# Altium PCB PCB_balancing_robot_v2.PcbDoc
Units mil, origin at the board's own origin, x right, y up, seen from the top; angles counter-clockwise.
Board outline 3230 x 3540 mil, 2 copper layers (Top Layer, Bottom Layer); 35 components, 31 nets, 164 pads, 2 vias.
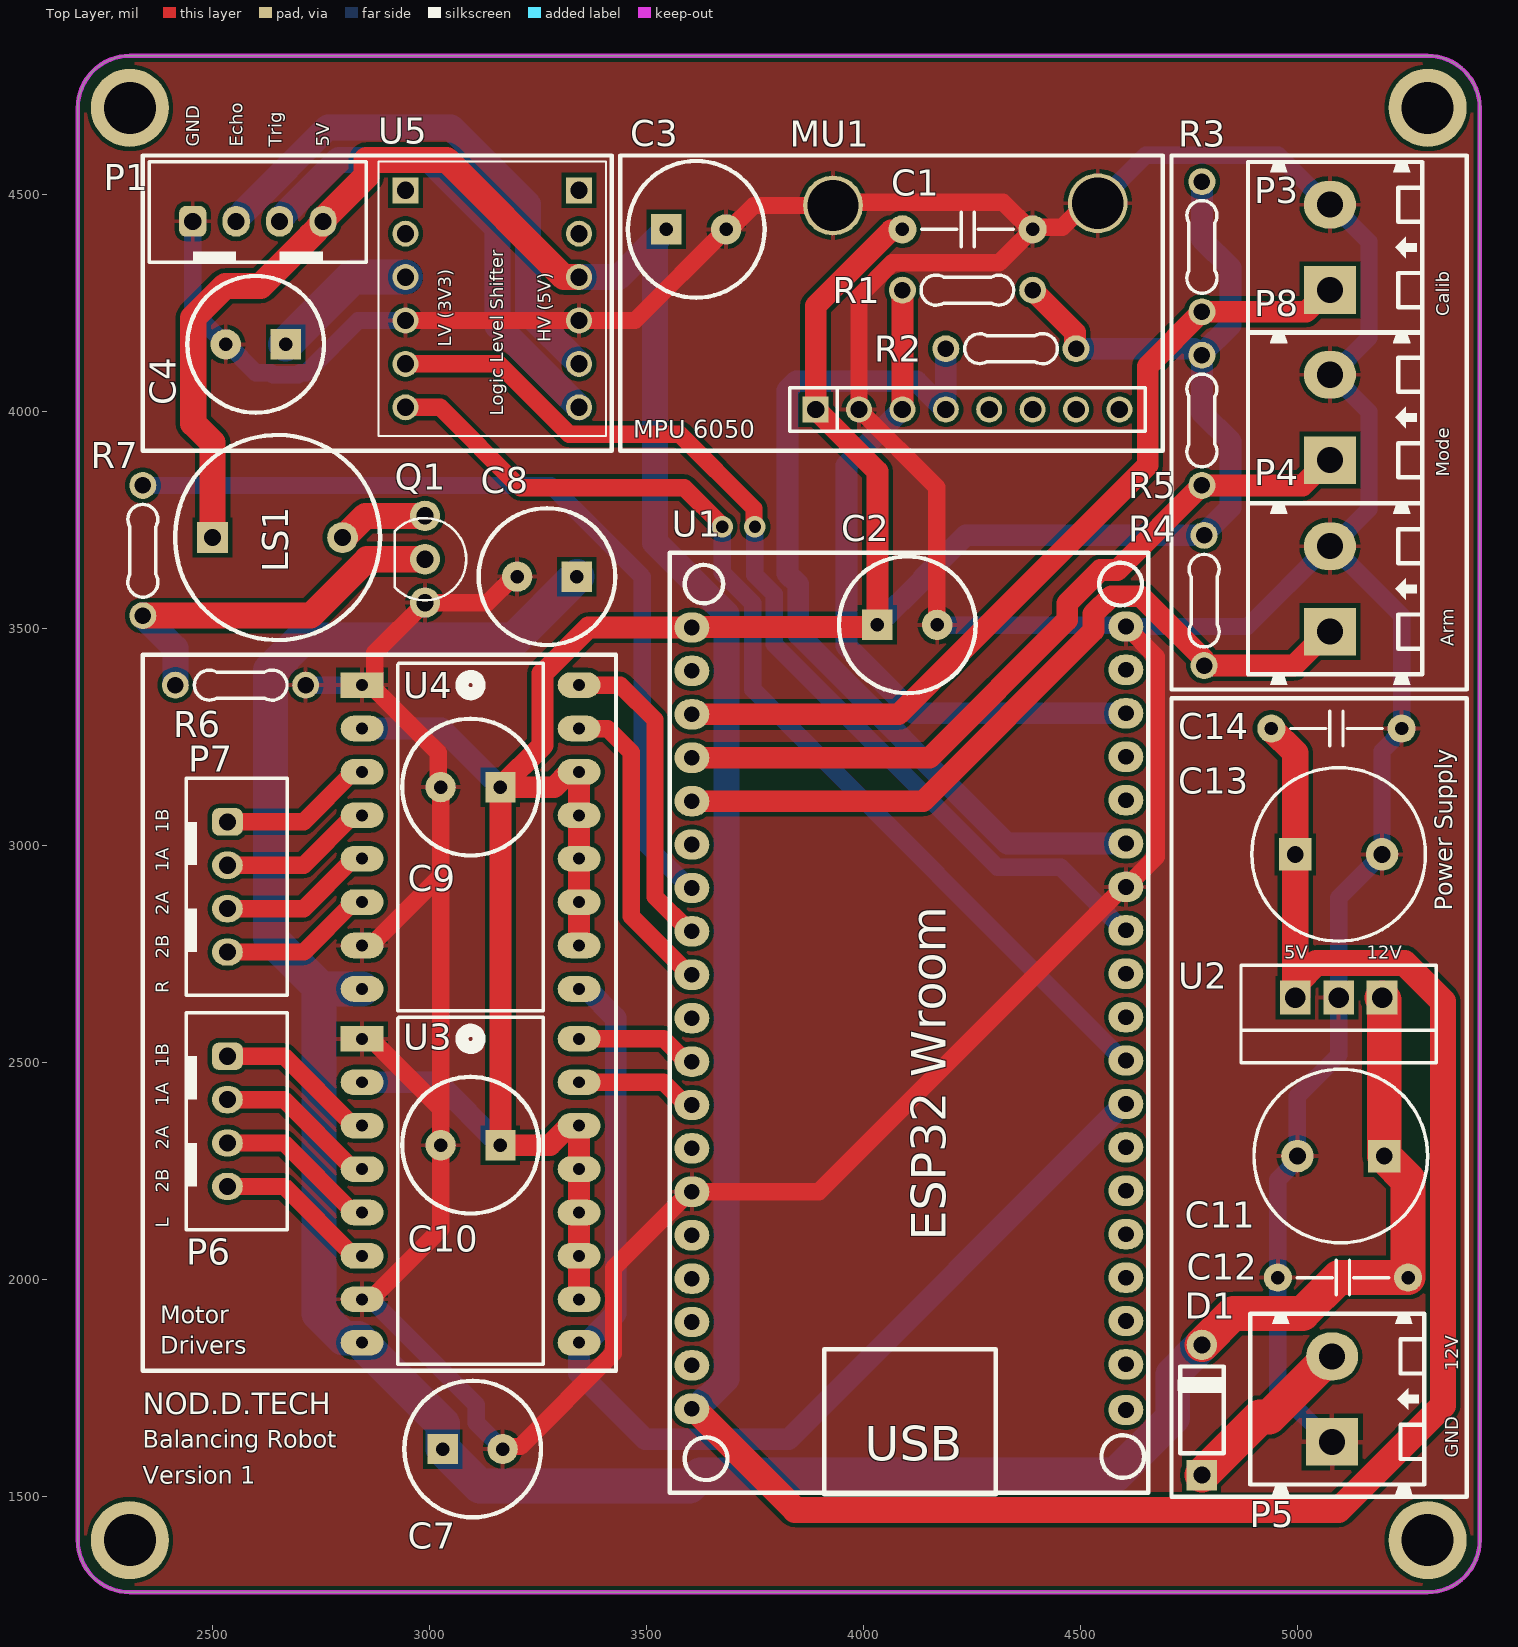
[diagram p0: Top Layer view]
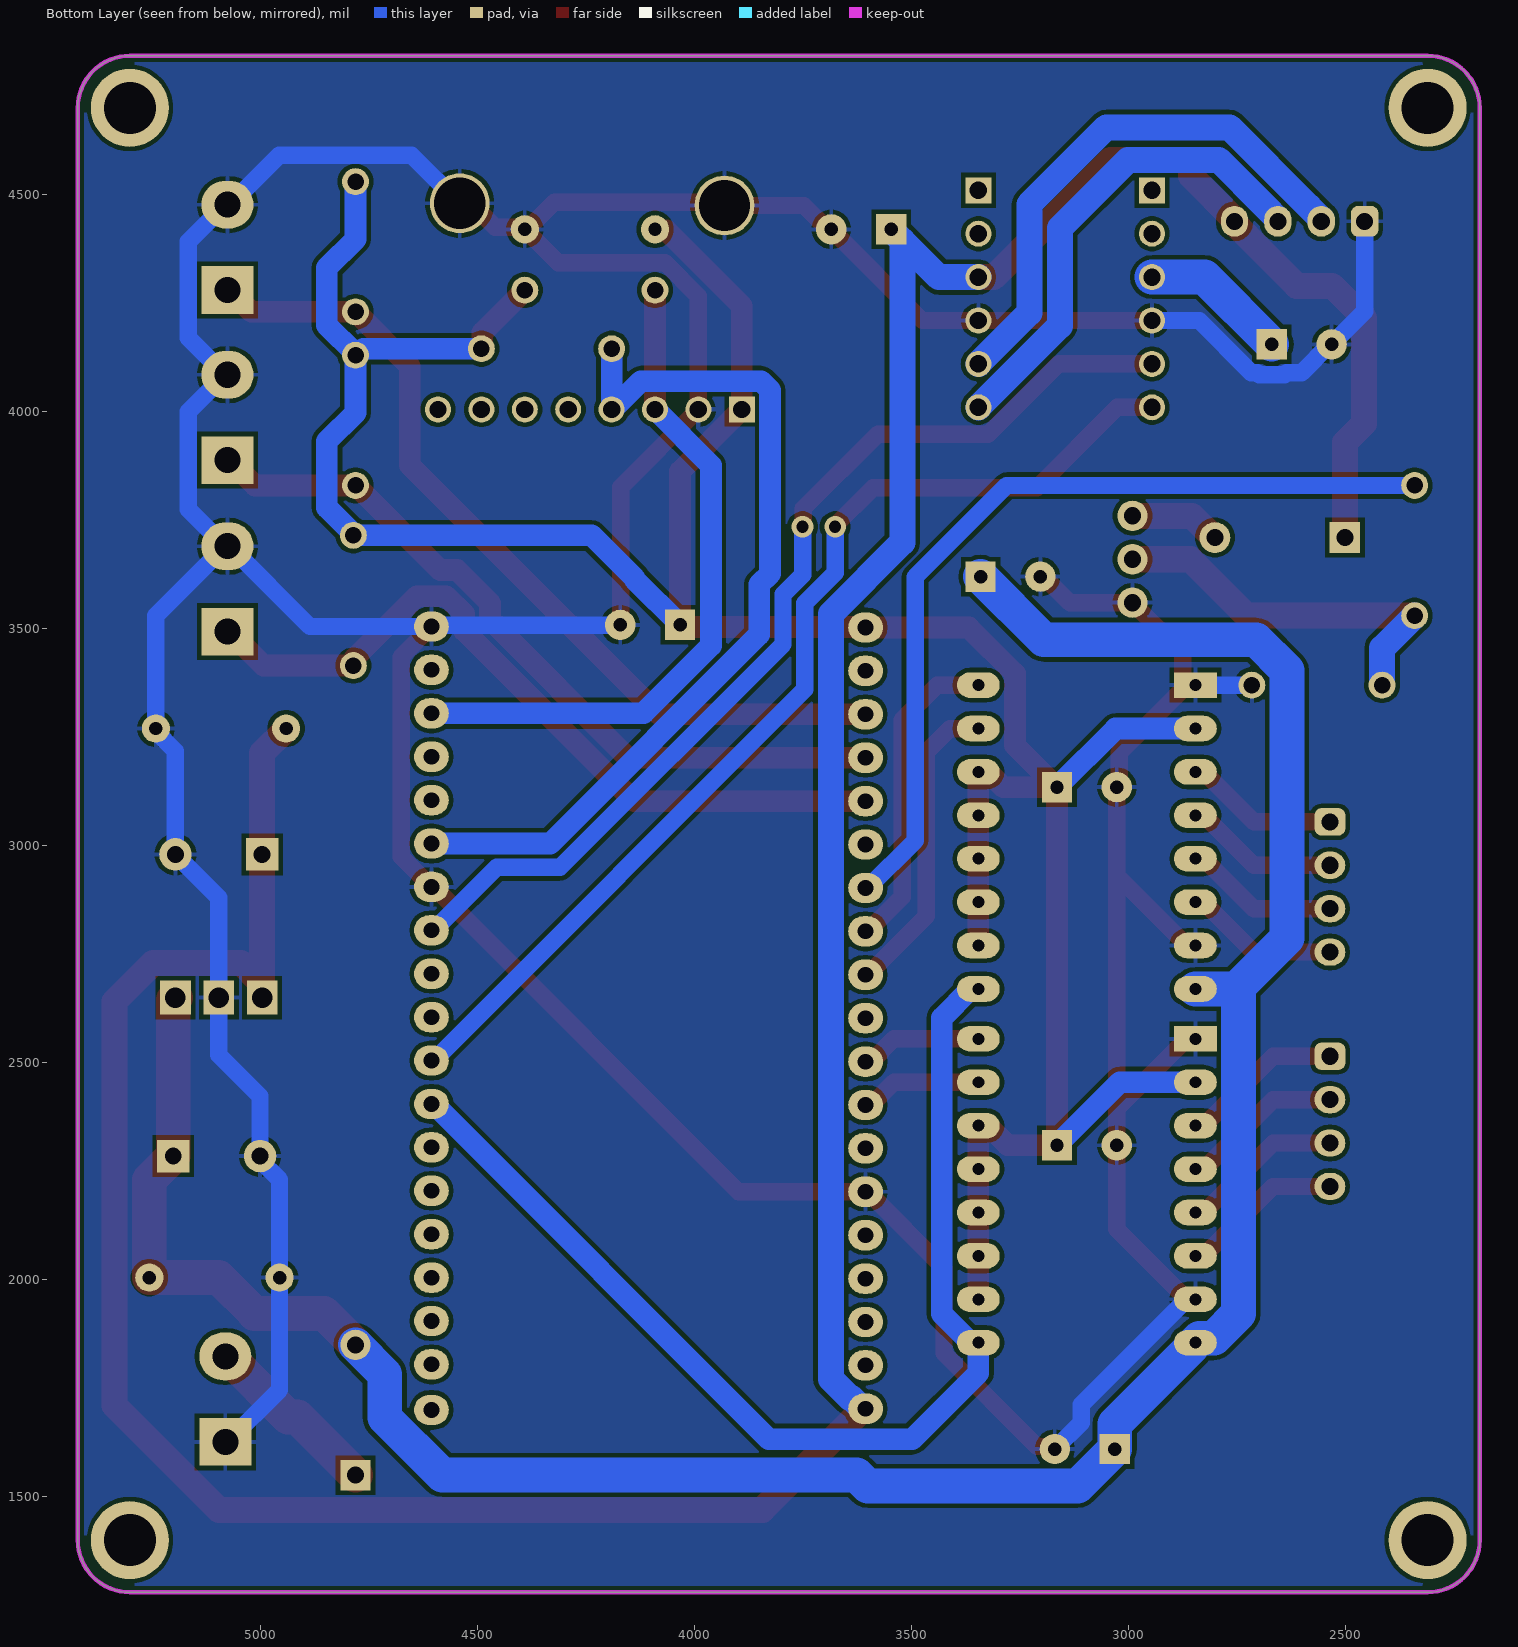
[diagram p1: Bottom Layer view, seen from below]
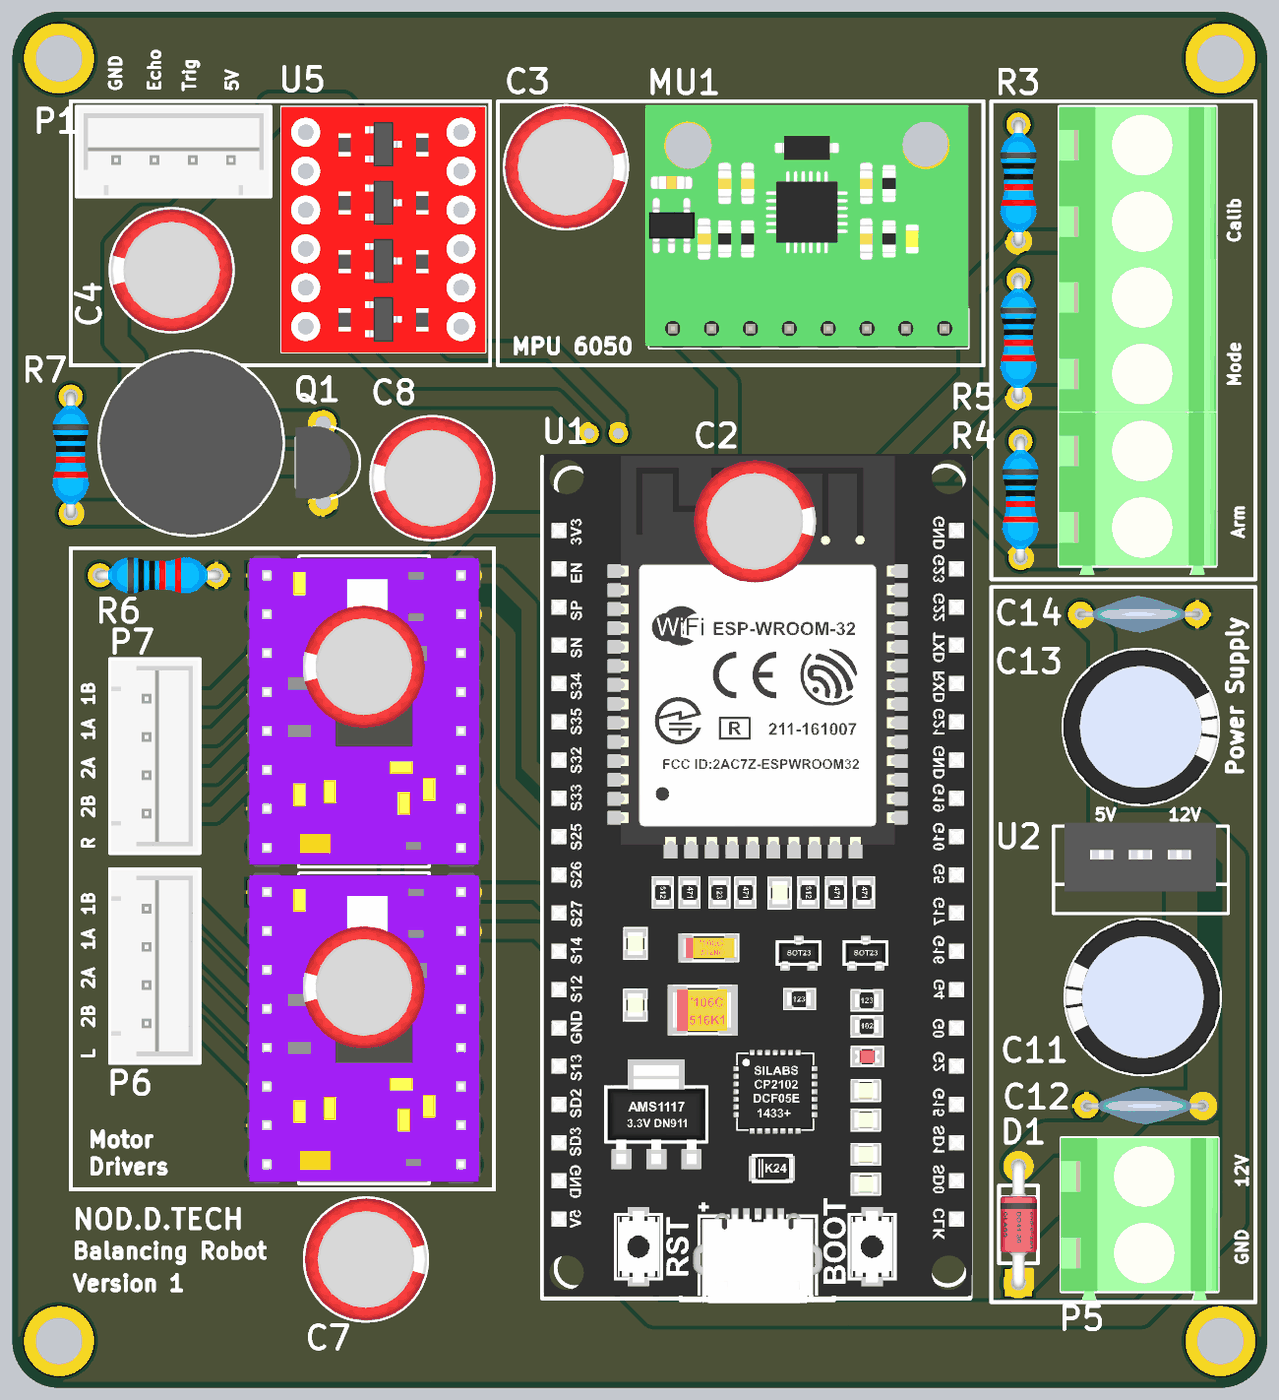
[diagram p2: 3D render of the assembled board from above, using the file's embedded part models]

## Layer stack, top to bottom
Top Solder: solder mask 0.4, Solder Resist, Dk 3.5
Top Layer: signal copper 1.4
Dielectric 1: dielectric 12.6, FR-4, Dk 4.8
Bottom Layer: signal copper 1.4
Bottom Solder: solder mask 0.4, Solder Resist, Dk 3.5

## Board outline
2190,1400 2190,4700 cw(c2310,4700) 2310,4820 5300,4820 cw(c5300,4700) 5420,4700 5420,1400 cw(c5300,1400) 5300,1280 2310,1280 cw(c2310,1400)

## Design rules (kind name [scope] priority, off if disabled: settings)
Clearance [All] p1: gap=10 ignorepadtopadclearanceinfootprint=FALSE
ComponentClearance [All] p1 off: gap=10 collisioncheckmode=3 verticalgap=10 showdistances=FALSE
HoleSize [All] p1: absolutevalues=TRUE maxlimit=130 minlimit=1 maxpercent=80.000 minpercent=20.000
HoleToHoleClearance [All] p1: gap=8 allowstackedmicrovias=TRUE
PolygonConnect [All] p1: connectstyle=Relief reliefconductorwidth=10 reliefentries=4 polygonreliefangle="90 Angle" airgapwidth=10
RoutingVias [All] p1: holewidth=28 width=50 viastyle="Through Hole" minholewidth=28 minwidth=50 maxholewidth=28 maxwidth=50
SilkToSilkClearance [All] p1: silktosilkclearance=6
SilkToSolderMaskClearance [IsPad] p1: minsilkscreentomaskgap=6 clearancetoexposedcopper=TRUE
SolderMaskExpansion [All] p1: expansion=4 istentingtop=FALSE
Width [All] p1: maxlimit=100 minlimit=10 preferedwidth=10
25 further rules are at their usual default settings.

## Components (designator, comment, footprint, x,y, rotation, side; value= is the part's Value field where it differs from the comment)
C1 "104" "CAP Ceramic/W300" 4390,4420 r180 top
C2 "C" CAP/D80/H125/LS35 4101.25,3508.75 r0 top
C3 "100uF" CAP/D80/H125/LS35 3615,4420 r0 top
C4 "100uF" CAP/D80/H125/LS35 2600,4155 r180 top
C7 "100uF" CAP/D80/H125/LS35 3100,1610 r0 top
C8 "100uF" CAP/D80/H125/LS35 3271.1,3620 r180 top
C9 "100uF" CAP/D80/H125/LS35 3095,3135 r180 top
C10 "100uF" CAP/D80/H125/LS35 3095,2310 r180 top
C11 "1000uF" CYL/D.400/LS.200 5100,2285 r180 top
C12 "104" "CAP Ceramic/W300" 5255,2005 r180 top
C13 "1000uF" CYL/D.400/LS.200 5095,2980 r0 top
C14 "104" "CAP Ceramic/W300" 4940,3270 r0 top
D1 "1N4007" DO-41 4780,1550 r90 top
LS1 "Buzzer" Buzzer-12MM 2650.39,3710 r0 top
MU1 "MPU6050" MPU6050 4110,4300 r0 top
P1 "HC-SR04" HDR/Header/4/BOX 2605,4438.48 r0 top
P3 "Button" HDR/Terminal/2/5mm 5075,4378.43 r90 top
P4 "Button" HDR/Terminal/2/5mm 5075,3591.57 r90 top
P5 "Power" HDR/Terminal/2/5mm 5080,1725 r90 top
P6 "STEPPER" HDR/Header/4/BOX 2535,2365 r270 top
P7 "STEPPER" HDR/Header/4/BOX 2535,2905 r270 top
P8 "Button" HDR/Terminal/2/5mm 5075,3986.57 r90 top
Q1 "BS170" TO92 2990,3660 r270 top
R1 "10k" "R 1/4W/300" 4390,4280 r180 top
R2 "10k" "R 1/4W/300" 4190,4145 r0 top
R3 "10k" "R 1/4W/300" 4780,4530 r270 top
R4 "10k" "R 1/4W/300" 4785,3715 r270 top
R5 "10k" "R 1/4W/300" 4780,4130 r270 top
R6 "10k" "R 1/4W/300" 2415,3370 r0 top
R7 "100" "R 1/4W/300" 2340,3830 r270 top
U1 "ESP32-DEVKI-V1.0-PIN38" ESP32-DEVKIT-V1.0-38PIN 4105,2590.09 r0 top
U2 "LM7805" TO-220 5095,2650 r180 top
U3 "A4988" A4988(driver) 2845,2555 r0 top
U4 "A4988" A4988(driver) 2845,3370 r0 top
U5 "BOB-12009" CONV_BOB-12009 3145,4260 r0 top

## Footprints (in the part's own frame and the unit in brackets; to place one, negate y for a bottom-side part, rotate by r counter-clockwise, add the part's x,y. Pads: shape width x height; smd on the part's side, far side on the other; paste and mask are expansions set on the pad)
A4988(driver) [mm]
  rect 2.5x1.5 hole 0.7: 1(0,0)
  oval 2.5x1.5 hole 0.7: 2(0,-2.54) 3(0,-5.08) 4(0,-7.62) 5(0,-10.16) 6(0,-12.7) 7(0,-15.24) 8(0,-17.78) 9(12.7,-17.78) 10(12.7,-15.24) 11(12.7,-12.7) 12(12.7,-10.16) 13(12.7,-7.62) 14(12.7,-5.08) 15(12.7,-2.54) 16(12.7,0)
  silkscreen extent 2.08,-19.05 10.62,1.27, body extent -1.27,-19.05 13.97,1.27, height 5.54
Buzzer-12MM [mm] "12MM"
  rect 1.8x1.8 hole 1: 1(-3.8,0)
  round 1.8 hole 1: 2(3.8,0)
  silkscreen extent -6,-6 6,6, body extent -6,-6 6,6, height 8.6
"CAP Ceramic/W300" [mil]
  round 65 hole 31: 1(0,0) 2(300,0)
  silkscreen extent 45,-40 255,40, body extent -8,-47 307,47, height 340
CAP/D80/H125/LS35 [mil] "Dia 8mm, Heigh 12.5mm, Lead Space 3.5mm (470uF/16V small)"
  rect 70x70 hole 31: 1(-68.9,0)
  round 70 hole 31: 2(68.9,0)
  silkscreen extent -157,-157 157,157, body extent -157,-157 157,157, height 454
CONV_BOB-12009 [mil]
  round 60 hole 40: GND_1(200,-50) GND_2(-200,-50) HV(200,50) HV2(200,150) HV3(200,-150) HV4(200,-250) LV(-200,50) LV2(-200,150) LV3(-200,-150) LV4(-200,-250)
  rect 60x60 / inner round 60 / far side rect 60x60 hole 40: HV1(200,250) LV1(-200,250)
  silkscreen extent -262,-316 262,316, body extent -262,-316 262,316, height 110
CYL/D.400/LS.200 [mil]
  rect 75x75 hole 39: 1(-100,0)
  round 75 hole 39: 2(100,0)
  silkscreen extent -200,-200 200,200, body extent -198,-199 200,199, height 500
DO-41 [mil]
  rect 70x70 hole 39.37: 1(0,0)
  round 70 hole 39.37: 2(300,0)
  silkscreen extent 50,-55 250,55, body extent -15,-47 315,47, height 99
ESP32-DEVKIT-V1.0-38PIN [mil] "DEVKIT 38 PIN"
  oval 80x70 hole 36: 1(-500,912.59) 2(-500,812.59) 3(-500,712.59) 4(-500,612.59) 5(-500,512.59) 6(-500,412.59) 7(-500,312.59) 8(-500,212.59) 9(-500,112.59) 10(-500,12.59) 11(-500,-87.41) 12(-500,-187.41) 13(-500,-287.41) 14(-500,-387.41) 15(-500,-487.41) 16(-500,-587.41) 17(-500,-687.41) 18(-500,-787.41) 19(-500,-887.41) 20(500,-890.09) 21(500,-785.09) 22(500,-685.09) 23(500,-585.09) 24(500,-485.09) 25(500,-385.09) 26(500,-285.09) 27(500,-185.09) 28(500,-85.09) 29(500,14.91) 30(500,114.91) 31(500,214.91) 32(500,314.91) 33(500,414.91) 34(500,514.91) 35(500,614.91) 36(500,714.91) 37(500,814.91) 38(500,914.91)
  silkscreen extent -551,-1085 551,1085, body extent -547,-1092 555,1092, height 269
HDR/Header/4/BOX [mm]
  rrect50% 1.6x1.8 hole 1: 1(-3.81,0)
  oval 1.6x1.8 hole 1: 2(-1.27,0) 3(1.27,0) 4(3.81,0)
  silkscreen extent -6.35,-2.41 6.35,3.5, body extent -6.25,-2.3 6.25,3.4, height 7
HDR/Terminal/2/5mm [mil] "Header 2, 2 pin, hight 400mil, Pin to Pin 200mil, Colour Green"
  rect 110x120 hole 60: 1(-98.43,0)
  oval 110x120 hole 60: 2(98.43,0)
  silkscreen extent -220,-213 197,189, body extent -220,-215 197,191, height 559
MPU6050 [mm]
  rect 1.52x1.52 hole 1.02: 1(-5.588,-7.493)
  round 3.5 hole 3: 2(-4.572,4.445) 2(10.922,4.572)
  round 1.52 hole 1.02: 2(-3.048,-7.493) 3(-0.508,-7.493) 4(2.032,-7.493) 5(4.572,-7.493) 6(7.112,-7.493) 7(9.652,-7.493) 8(12.192,-7.493)
  silkscreen extent -7.11,-8.76 13.71,-6.22, body extent -7.37,-8.76 13.74,7.11, height 14.54
"R 1/4W/300" [mil] "Through hole resitor, axial 300mils, 1/4W"
  round 62 hole 38: 1(0,0) 2(300,0)
  silkscreen extent 44,-35 257,35, body extent -12,-47 312,47, height 97
TO92 [mil]
  round 70 hole 40: 1(-100,0) 2(0,0) 3(100,0)
  silkscreen extent -95,-70 95,95, body extent -94,-71 94,71, height 210
TO-220 [mm]
  rect 1.8x2 hole 1.2: 1(-2.54,0) 2(0,0) 3(2.54,0)
  silkscreen extent -5.72,-1.91 5.71,3.81, body extent -4.92,-2.13 4.98,2.37, height 8.08

## Part data
C1 C12 C14: library part "Capacitor NP", "Capacitor non-pol"
C2 C3 C4 C7 C8 C9 C10 C11 C13: library part Capacitor, "Capacitor pol"
D1: library part Diode, "Default Diode"
LS1: PACKAGE=None, Availability=Unavailable, MP=CST-951AP, Price=None
MU1: Manufacturer="W¨¹rth Elektronik eiSos GmbH", partNo=613004143121, ComponentLink1 Description=Manufacturer, ComponentLink1URL=http://www.we-online.com, ComponentLink2 Description=Datasheet, ComponentLink2URL=http://katalog.we-online.de/em/datasheet/6130xx143121.pdf, Created by="Karrer Zheng", Created Date="29 March 2013", NoPins=04
P1 P6 P7: library part "Header 4", "Header, 4-Pin"
P3 P4 P5 P8: library part "Header 2", "Header, 2-Pin"
Q1: "Nì±„ë„ 60V 500mA(Ta) 830mW(Ta) ê´€í†µí™€ TO-92-3", PACKAGE="TO-92-3 ON Semiconductor", Check_prices=https://www.snapeda.com/parts/BS170/Onsemi/view-part/?ref=eda, MF=onsemi, MP=BS170, SnapEDA_Link=https://www.snapeda.com/parts/BS170/Onsemi/view-part/?ref=snap
R1 R2 R3 R4 R5 R6 R7: library part Resistor, "Resistor"
U2: library part 78xx, "LDO Fixed Voltage regulator"
U5: "BSS138 - Logic-Level Translator Interface Evaluation Board", PACKAGE=None, Check_prices=https://www.snapeda.com/parts/BOB-12009/SparkFun/view-part/?ref=eda, MF=SparkFun, MP=BOB-12009, SnapEDA_Link=https://www.snapeda.com/parts/BOB-12009/SparkFun/view-part/?ref=snap

## Free pads (board coordinates)
  round 180 hole 120: 3(2310,1400) 3(2310,4700) 3(5300,1400) 3(5300,4700)

## Via types
v1: diameter 50, hole 28, Top Layer to Bottom Layer, 2 vias

## Nets (pads, with @x,y where several pads share a name; then routed paths per layer and width w, separated by ;. In a path a pad name is that pad's centre, name@x,y a point inside that pad or via, vN(x,y) a via of type N, cw(c..) or ccw(c..) an arc to the next point about the centre after c; other vN are vias at no path point)
1A_L: P6.2 U3.4 | length 376.3
  Top Layer w40: P6.2 2665.32,2415 2825.32,2255 U3.4
1A_R: P7.2 U4.4 | length 357.6
  Top Layer w40: P7.2 2710.32,2955 2825.32,3070 U4.4
1B_L: P6.1 U3.3 | length 376.3
  Top Layer w40: P6.1 2665.32,2515 2825.32,2355 U3.3
1B_R: P7.1 U4.3 | length 357.6
  Top Layer w40: P7.1 2710.32,3055 2825.32,3170 U4.3
2A_L: P6.3 U3.5 | length 376.3
  Top Layer w40: P6.3 2665.32,2315 2825.32,2155 U3.5
2A_R: P7.3 U4.5 | length 357.6
  Top Layer w40: P7.3 2710.32,2855 2825.32,2970 U4.5
2B_L: P6.4 U3.6 | length 376.3
  Top Layer w40: P6.4 2665.32,2215 2825.32,2055 U3.6
2B_R: P7.4 U4.6 | length 357.6
  Top Layer w40: P7.4 2710.32,2755 2825.32,2870 U4.6
3.3V: C1.2 C2.1 C9.1 C10.1 MU1.1 R1.1 R2.2 R3.1 R4.1 R5.1 U1.1 U3.2 U3.10 U3.11 U3.12 U3.13 U3.14 U4.2 U4.10 U4.11 U4.12 U4.13 U4.14 | length 7191.3
  Top Layer w50: U3.10 U3.11 U3.12 U3.13 U3.14 3322.86,2355 3277.86,2310 C10.1 C9.1 ; U4.10 U4.11 U4.12 U4.13 U4.14 3322.86,3170 3287.86,3135 C9.1 ; U1.1 3366.73,3502.68 3260.79,3396.73 3260.79,3231.89 C9.1 ; U1.1@3606.25,3503.93 4027.53,3503.93 C2.1 ; C2.1@4032.35,3511.25 4032.35,3862.65 MU1.1 3890,4244.05 4063.08,4417.13 4087.13,4417.13 C1.2 ; R1.1 4487.7,4182.3 4487.7,4147.3 R2.2
  Bottom Layer w50: U3.2 3018.9,2455 C10.1 ; U4.2 3028.9,3270 C9.1 ; C2.1 4136.81,3613.21 4136.81,3615.71 4236.1,3715 R4.1 4785,3718.25 4846,3779.25 4846,3931.71 4780,3997.71 R5.1 ; R2.2 4761.75,4145 4776.75,4130 R5.1 ; R3.1 4780,4397.71 4846,4331.71 4846,4199.25 4780,4133.25 R5.1
+5: C3.1 C13.1 C14.1 LS1.1 P1.4 U1.19 U2.3 U5.HV | length 8677.4
  Top Layer w60: LS1.1 2500.79,3928.41 2456.1,3973.09 2456.1,4216.1 2530,4290 2611.57,4290 2726.5,4404.93 2726.5,4405.23 2755,4433.73 P1.4 2755,4442.42 2855,4542.42 2855,4580 3040,4580 3310,4310 U5.HV ; U1.19 3610,1702.67 3842.68,1470 5094.99,1470 5335,1710.01 5335,2641.37 5246.37,2730 5043.63,2730 5000.43,2686.8 5000.43,2655.43 U2.3 C13.1 4995,3213.65 4940,3268.65 C14.1
  Bottom Layer w60: U5.HV 3436.1,4310 C3.1@3520,4393.9 ; C3.1 C3.1@3520,4393.9 ; U1.19 3612.71,1702.67 3637.71,1727.67 3641.07,1727.67 3685,1771.61 3685,3533.74 3520,3698.74 C3.1@3520,4393.9
+12: C7.1 C8.1 C11.1 C12.1 D1.2 U2.1 U3.8 U4.8 | length 6041.7
  Top Layer w80: D1.2 4852.5,1922.5 5012.5,1922.5 5095,2005 C12.1 5255,2230 C11.1 5200,2645 U2.1
  Bottom Layer w80: 2745.79,2670 2745.79,1922.06 2802.37,1865.47 2835.79,1865.47 2845,1856.26 U3.8 ; U4.8 2750.94,2670 2634,2786.94 2634,3403.55 2704.87,3474.42 3194.42,3474.42 C8.1 ; U3.8@2854.21,1844.53 3031.1,1667.64 C7.1 3116.1,1525 3599.94,1525 3624.94,1550 4580.21,1550 4712.6,1682.4 4712.6,1782.6 D1.2
Arm: P4.1 R4.2 U1.5 | length 1795.2
  Top Layer w50: U1.5 4137.53,3102.68 4530,3495.15 4530,3533.99 4571.01,3575 4638.99,3575 4782.7,3431.29 4782.7,3417.3 R4.2 4991.85,3415 5070,3493.15 P4.1
BUZZ: R7.1 U1.7 | length 2004.9
  Bottom Layer w40: R7.1 3280,3830 3490.83,3619.17 3490.83,3011.84 3600,2902.68 U1.7
Calib: P3.1 R3.2 U1.3 | length 2008.6
  Top Layer w50: U1.3 4081.07,3302.68 4654.92,3876.53 4654.92,4104.92 R3.2 5020,4230 5070,4280 P3.1
DIR_L: U1.11 U3.16 | length 281.7
  Top Layer w40: U3.16 3539.56,2555 3591.88,2502.68 U1.11
DIR_R: U1.8 U4.16 | length 733.6
  Top Layer w40: U4.16 3440,3370 3520,3290 3520,2882.68 3600,2802.68 U1.8
Echo: P1.2 U5.HV3 | length 1254.8
  Bottom Layer w60: P1.2 2555,4443.23 2583.5,4471.73 2583.5,4472.03 2766.47,4655 3050,4655 3227.43,4477.57 3227.43,4227.57 U5.HV3
Echo_ESP: U1.31 U5.LV3 | length 2356.4
  Top Layer w40: U5.LV3 3160.15,4110 3322.06,3948.09 3576.91,3948.09 3748.09,3776.91 3748.09,3736.91 v1(3750,3735)
  Bottom Layer w40: v1(3750,3735) 3750,3624.3 3795,3579.3 3795,3463.97 4308.97,2950 4455,2950 4600,2805 U1.31
ENABLE: U1.27 U3.9 U4.9 | length 2618
  Bottom Layer w50: U4.9 3362.23,2670 3429.21,2603.02 3429.21,1921.98 3362.23,1855 U3.9 3345,1785 3497.33,1632.67 3827.68,1632.67 4600,2405 U1.27
GND: C1.1 C2.2 C3.2 C4.2 C7.2 C8.2 C9.2 C10.2 C11.2 C12.2 C13.2 C14.2 MU1.2 P1.1 P3.2 P4.2 P5.1 P8.2 Q1.3 R6.2 U1.14 U1.32 U1.38 U2.2 U3.1 U3.7 U4.1 U4.7 U5.GND_1 U5.GND_2 | length 14642.5
  Top Layer w40: U3.7 2864.68,1955 3026.1,2116.42 C10.2 3026.1,2931.42 ; U3.1 2864.68,2555 3020.36,2399.32 ; U4.7 2864.68,2770 3026.1,2931.42 ; U4.1 U4.1@2864.68,3370 ; U5.GND_2 U5.GND_1 3473.9,4210 C3.2 3692.02,4420 3747.02,4475 3930,4475 3937.5,4482.5 4321.69,4482.5 4384.19,4420 C1.1 ; C7.2 3174.64,1615.74 3209.61,1615.74 3424.21,1830.34 3424.21,2026.89 3600,2202.68 U1.14 3897.68,2202.68 4600,2905 U1.32 4605.65,2905 4675,2974.35 4675,3435.65 4605.65,3505 U1.38 ; C8.2 3194.09,3620 3134.09,3560 Q1.3 2874.21,3444.21 2874.21,3379.53 U4.1@2864.68,3370 ; C2.2 4168.9,3510 4168.9,3826.1 3990,4005 3990,4266.27 4066.37,4342.64 4312.64,4342.64 C1.1 ; MU1.2@4540,4480 4513.54,4480 4458.32,4424.78 4394.78,4424.78 C1.1 ; U4.1@2864.68,3370 3020.36,3214.32 3020.36,3140.74 C9.2 3026.1,2931.42
  Bottom Layer w40: P1.1 2455,4231.1 C4.2 2535.45,4155 2600.45,4090 2634.9,4090 2639.9,4085 2697.89,4085 2702.89,4090 2716.32,4090 2836.32,4210 U5.GND_2 ; R6.2 U4.1 ; U3.7 2864.68,1955 3107.97,1711.71 3107.97,1670.92 C7.2 ; C2.2 4171.4,3507.5 4602.5,3507.5 U1.38 4885,3505 5070,3690 P4.2 P4.2@5080,3690 ; MU1.2@4540,4480 4651,4591 4955.85,4591 5070,4476.85 P3.2 5080,4476.85 5165,4391.85 5165,4170 P8.2@5080,4085 ; P8.2 P8.2@5080,4085 ; P5.1 5075,1626.57 4955,1746.57 C12.2 4955,2230.53 5000,2275.53 C11.2 5000,2422.77 5095,2517.77 U2.2 5095,2880 C13.2 5195,3218.24 5240,3263.24 C14.2 5240,3530 P4.2@5080,3690 ; P4.2@5080,3690 5165,3775 5165,4000 P8.2@5080,4085
Mode: P8.1 R5.2 U1.4 | length 1776.7
  Top Layer w50: U1.4 4152.68,3202.68 4470,3520 4470,3558.85 4546.15,3635 4585,3635 R5.2 5011.85,3830 5070,3888.15 P8.1
NetC4_1: C4.1 U5.LV | length 340.3
  Bottom Layer w80: C4.1 2823.9,4310 U5.LV
NetD1_1: D1.1 P5.2 | length 413.3
  Top Layer w80: D1.1 4913.84,1683.84 4935.42,1683.84 5075,1823.43 P5.2
NetLS1_2: LS1.2 Q1.1 | length 210.7
  Top Layer w60: LS1.2 2802.94,3710 2852.94,3760 Q1.1
NetQ1_2: Q1.2 R6.1 R7.2 | length 894.9
  Top Layer w60: R7.2 2726.68,3530 2856.68,3660 Q1.2
  Bottom Layer w60: R7.2 2415,3455 R6.1
SCL: MU1.3 R1.2 U1.36 | length 1581.2
  Top Layer w50: MU1.3 R1.2
  Bottom Layer w50: MU1.3 3961.1,3876.1 3961.1,3460.5 4116.6,3305 U1.36
SDA: MU1.4 R2.1 U1.33 | length 2067.8
  Bottom Layer w50: R2.1 MU1.4 4187.34,4005 4122.42,4069.92 3845.58,4069.92 3825.08,4049.42 3825.08,3627.01 3850,3602.09 3850,3486.75 4331.75,3005 U1.33
STEP_L: U1.12 U3.15 | length 281.7
  Top Layer w40: U3.15 3539.56,2455 3591.88,2402.68 U1.12
STEP_R: U1.9 U4.15 | length 716
  Top Layer w40: U4.15 3345.65,3269.35 3410.65,3269.35 3465,3215 3465,2837.68 3600,2702.68 U1.9
Trig: P1.3 U5.HV4 | length 1119.5
  Bottom Layer w60: P1.3 2655,4443.23 2683.5,4471.73 2683.5,4472.03 2791.47,4580 3000,4580 3157.43,4422.57 3157.43,4197.57 U5.HV4
Trig_ESP: U1.28 U5.LV4 | length 2463.6
  Top Layer w40: U5.LV4 3025,4010 3210,3825 3587.71,3825 3675,3737.71 v1(3675,3735)
  Bottom Layer w40: v1(3675,3735) 3675,3628.59 3745,3558.59 3745,3360 4600,2505 U1.28
pads on no net: MU1.5 MU1.6 MU1.7 MU1.8 U1.2 U1.6 U1.10 U1.13 U1.15 U1.16 U1.17 U1.18 U1.20 U1.21 U1.22 U1.23 U1.24 U1.25 U1.26 U1.29 U1.30 U1.34 U1.35 U1.37 U5.HV1 U5.HV2 U5.LV1 U5.LV2

## Polygon pours and split planes (outlines as drawn)
GND on Top Layer "GND_L01_P000" (solid, remove dead copper, pour order 0): 2060,4900 2090,4930 5520,4930 5630,4820 5630,1130 2080,1130 2070,1120 2060,1130 2060,4890
GND on Bottom Layer "GND_L02_P001" (solid, remove dead copper, pour order 1): 5560,4900 5590,4870 5530,4810 5530,1150 2200,1150 2110,1240 2110,4900

## Keep-outs
Keep-Out Layer:
  the board outline again, w10

## Silkscreen, mask and mechanical layers (free items; w line width, h text height)
Top Overlay:
  lines w10: 2340,1790 3430,1790 3430,3440 2340,3440 2340,1790 ; 2340,3910 3420,3910 3420,4590 2340,4590 2340,3910 ; 3440,3910 4690,3910 4690,4590 3440,4590 3440,3910 ; 4710,1500 5390,1500 5390,3340 4710,3340 4710,1500 ; 4710,3360 5390,3360 5390,4590 4710,4590 4710,3360
  text "GND" at 2470,4610 h30 r90
  text "Echo" at 2570,4610 h30 r90
  text "Trig" at 2660,4610 h30 r90
  text "5V" at 2770,4610 h30 r90
  text "Calib" at 5350,4220 h30 r90
  text "HV (5V)" at 3280,4160 h30 r90
  text "LV (3V3)" at 3050,4150 h30 r90
  text "Logic Level Shifter" at 3170,3990 h30 r90
  text "MPU 6050" at 3470,3940 h40
  text "Mode" at 5350,3850 h30 r90
  text "Arm" at 5360,3460 h30 r90
  text "1B" at 2400,3030 h30 r90
  text "1A" at 2400,2940 h30 r90
  text "Power Supply" at 5356.67,2850 h40 r90
  text "2A" at 2400,2840 h30 r90
  text "2B" at 2400,2740 h30 r90
  text "5V" at 4970,2740 h30
  text "12V" at 5160,2740 h30
  text "R" at 2400,2660 h30 r90
  text "1B" at 2400,2490 h30 r90
  text "1A" at 2400,2400 h30 r90
  text "2A" at 2400,2300 h30 r90
  text "2B" at 2400,2200 h30 r90
  text "L" at 2400,2120 h30 r90
  text "Motor" at 2380,1900 h40
  text "Drivers" at 2380,1830 h40
  text "12V" at 5370,1790 h30 r90
  text "NOD.D.TECH" at 2340,1690 h50
  text "Balancing Robot" at 2340,1613.33 h40
  text "GND" at 5370,1590 h30 r90
  text "Version 1" at 2340,1530 h40

## Text inside footprints (layer, text, board x,y; h text height)
U1: Top Overlay "USB" at 4002.64,1582.67 h80; Top Overlay "ESP32 Wroom" at 4190,2090 h80 r90